# Altium PCB PWRMOD-001-RevA.PcbDoc
Units mm, origin at the board's own origin, x right, y up, seen from the top; angles counter-clockwise.
Board outline 50.8 x 47.24 mm, 4 copper layers (Top Layer, GND1, Layer 1, Bottom Layer), stack 1.716 mm thick; 46 components, 30 nets, 158 pads, 346 vias.
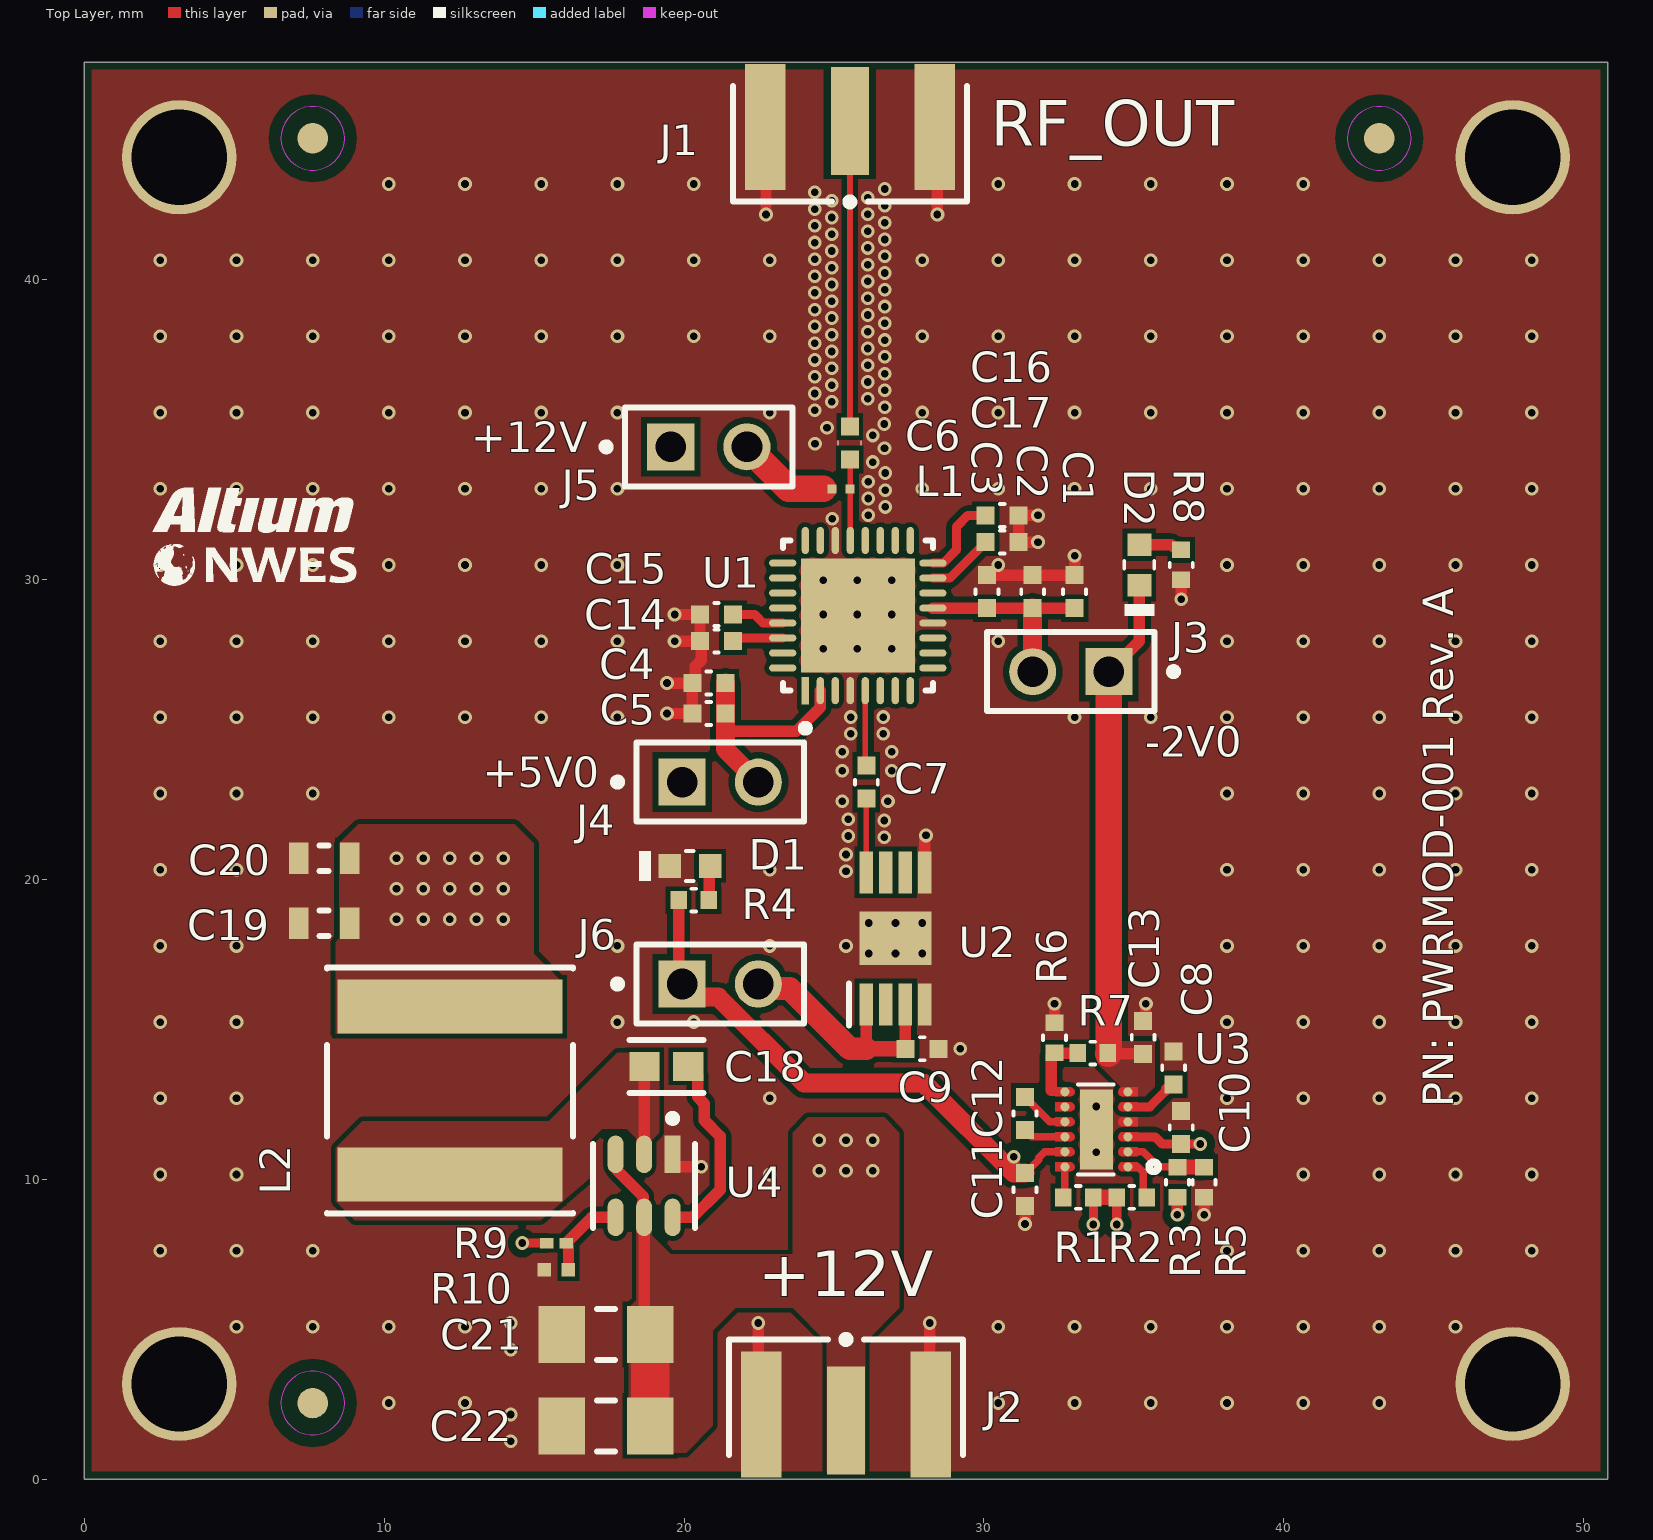
[diagram p0: Top Layer view]
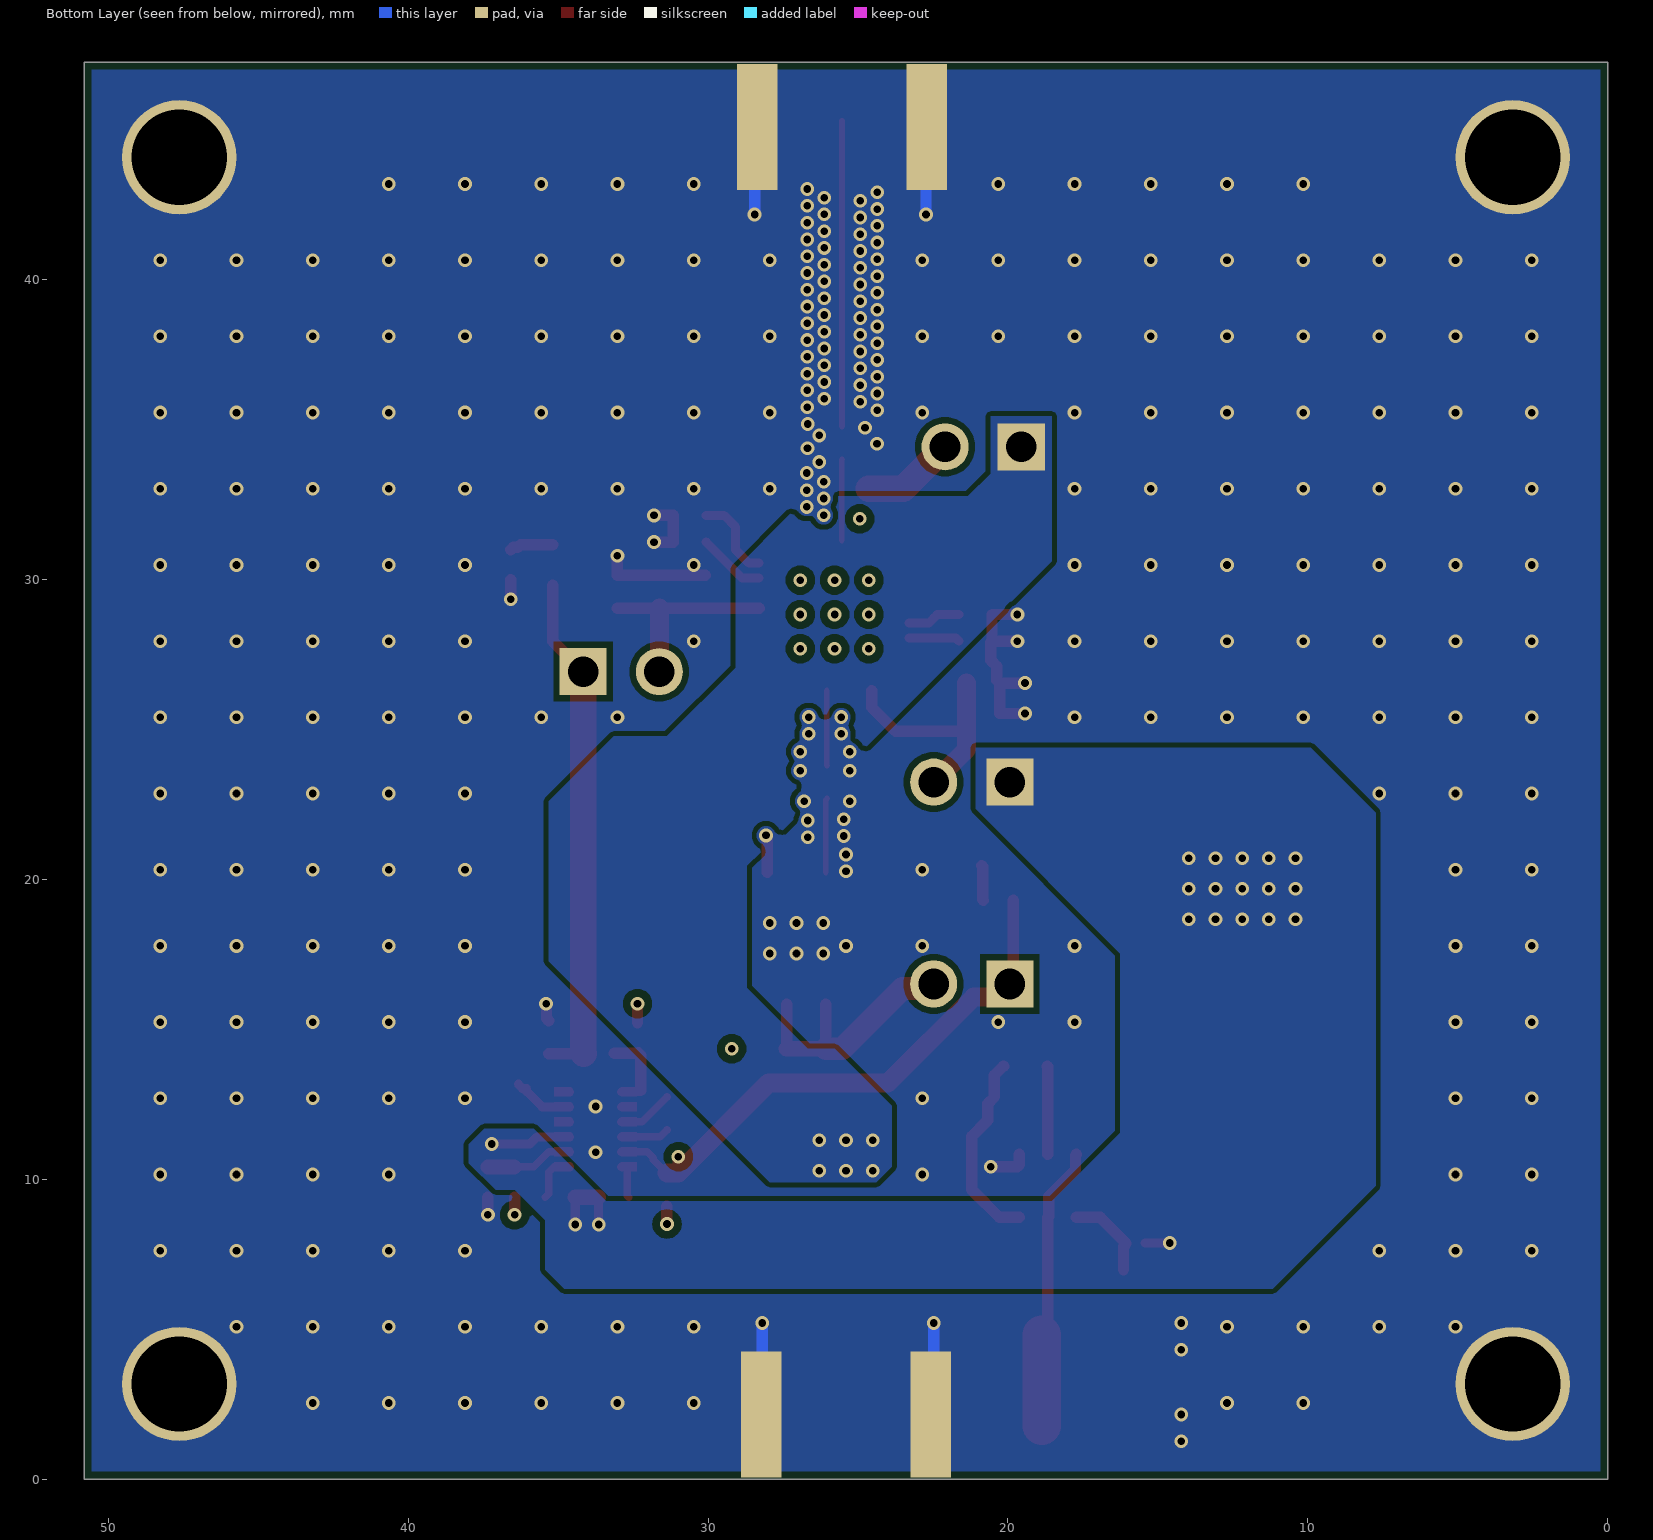
[diagram p1: Bottom Layer view, seen from below]
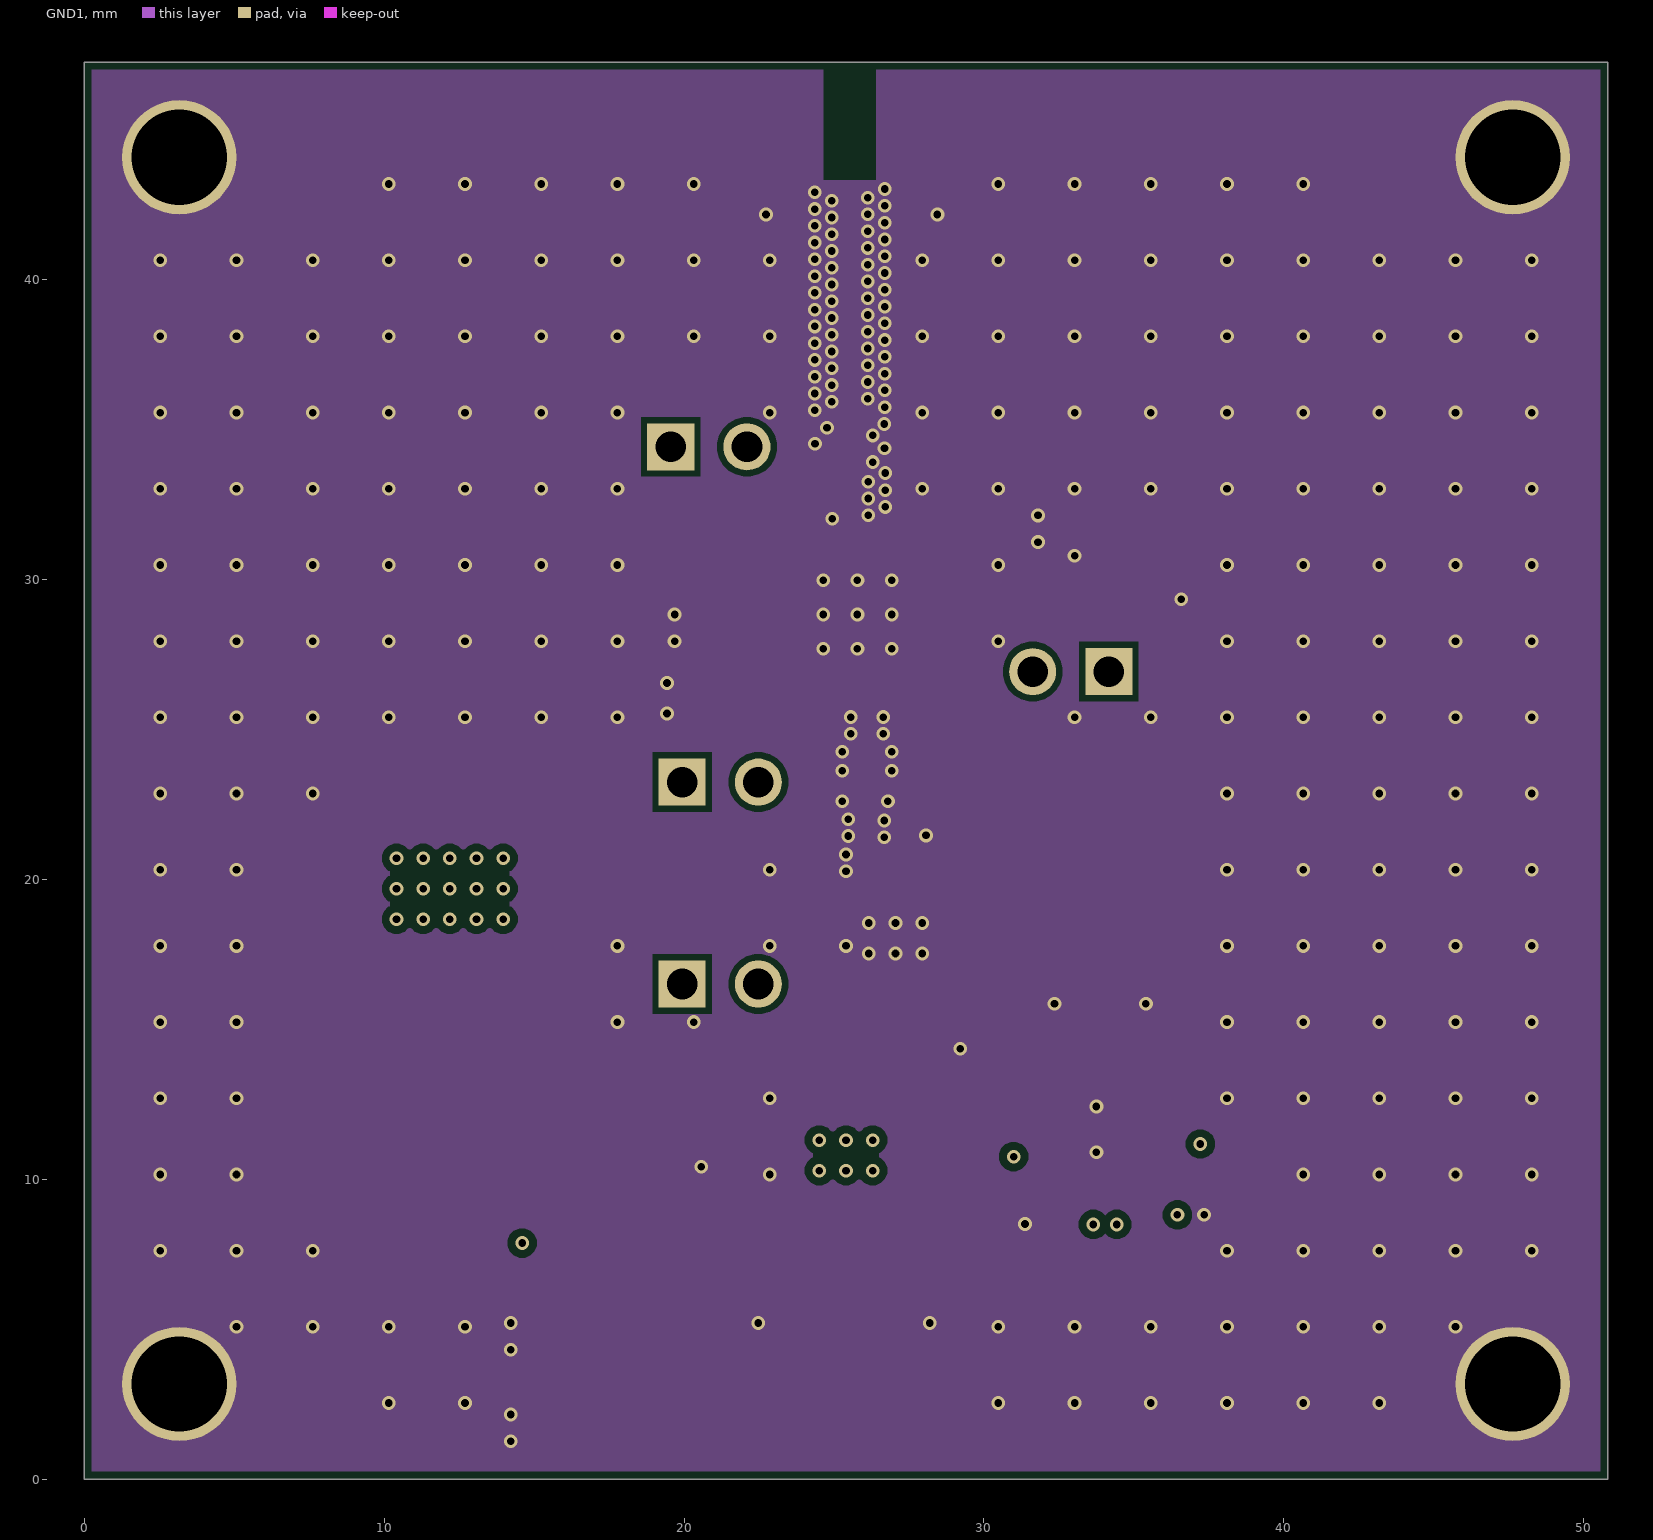
[diagram p2: GND1]
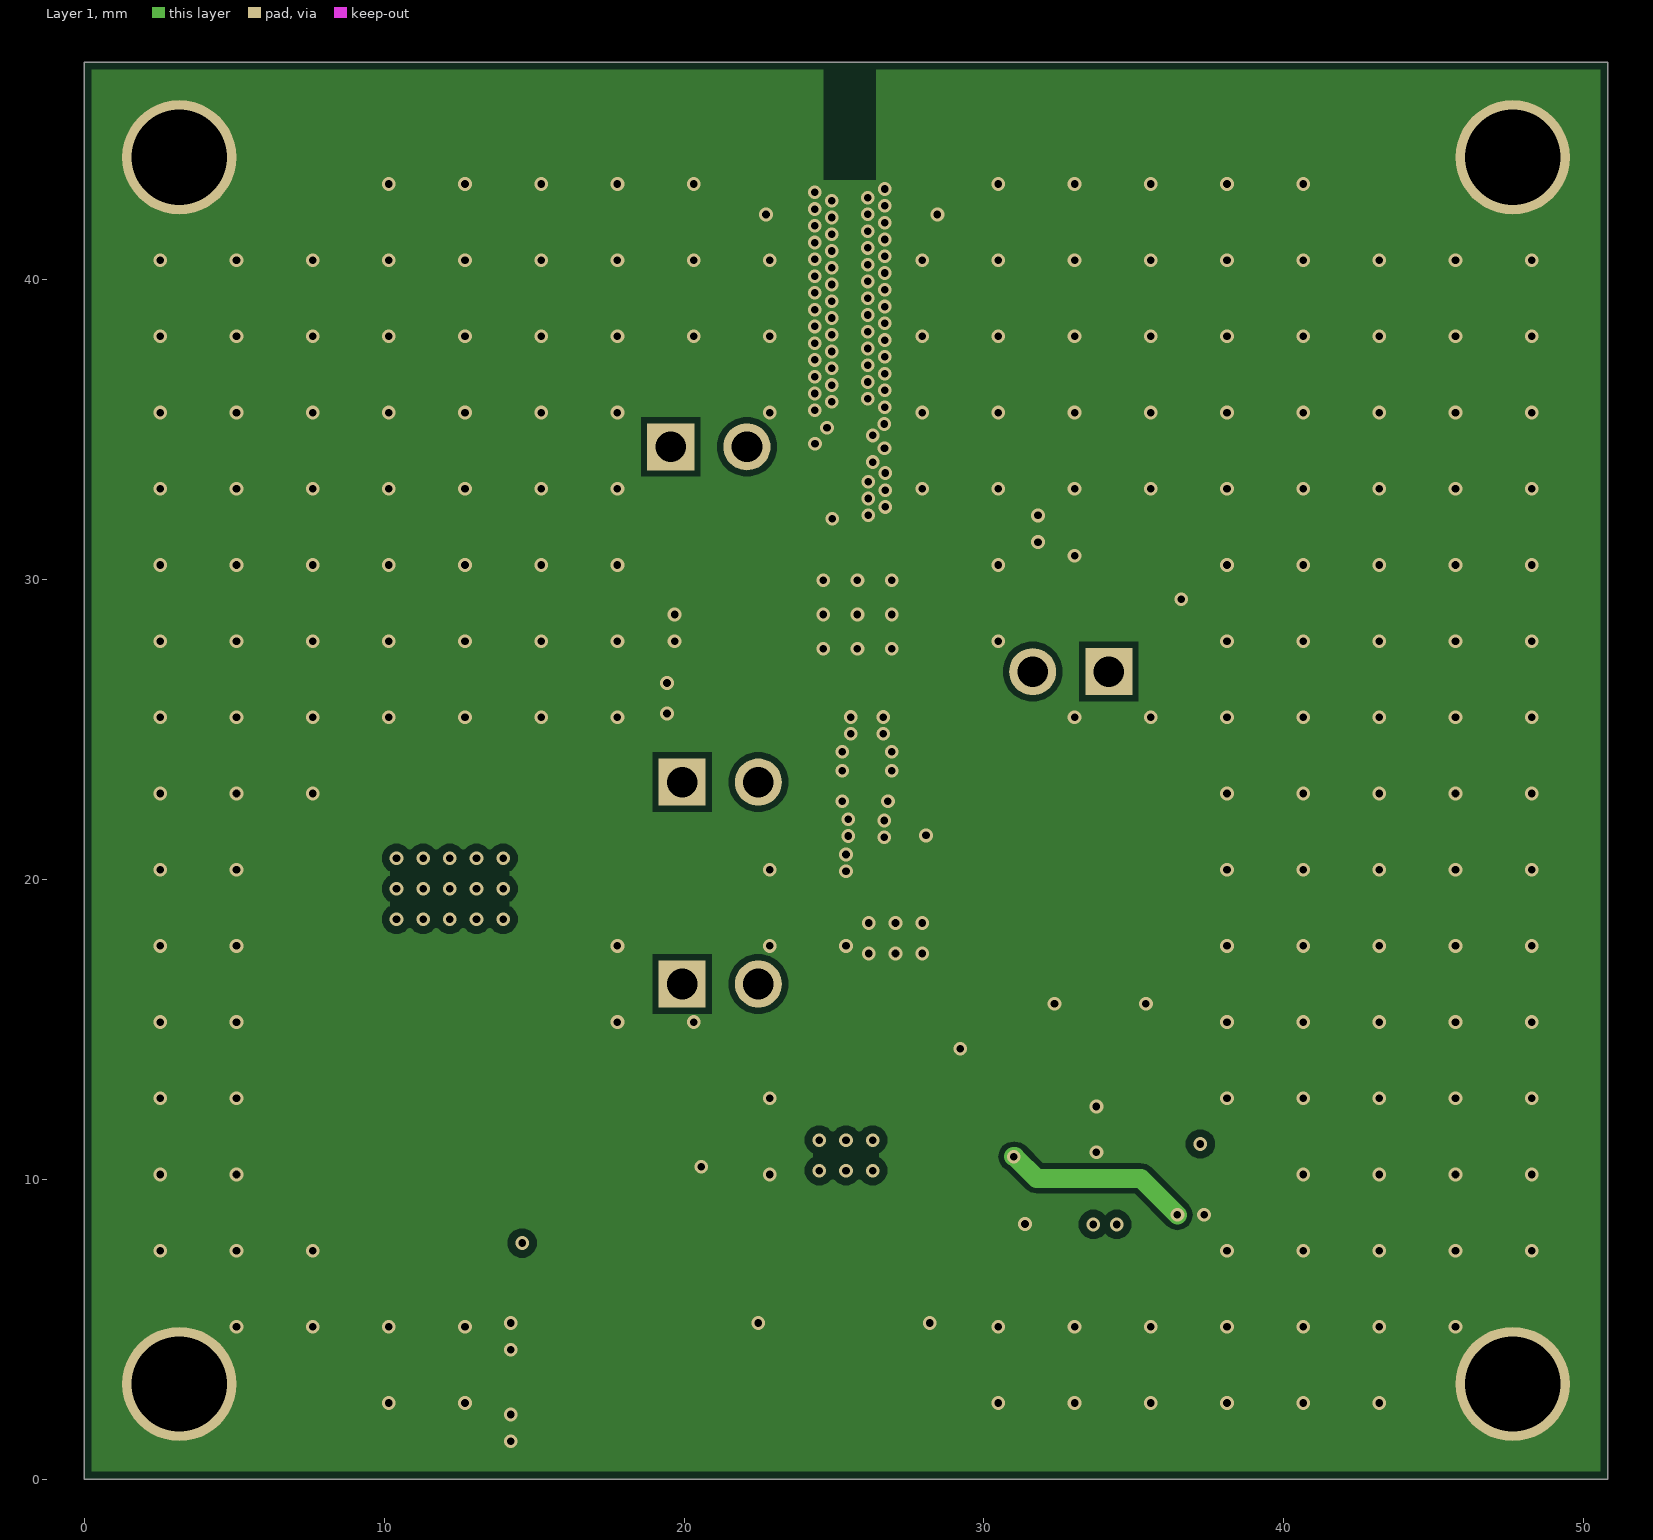
[diagram p3: Layer 1]
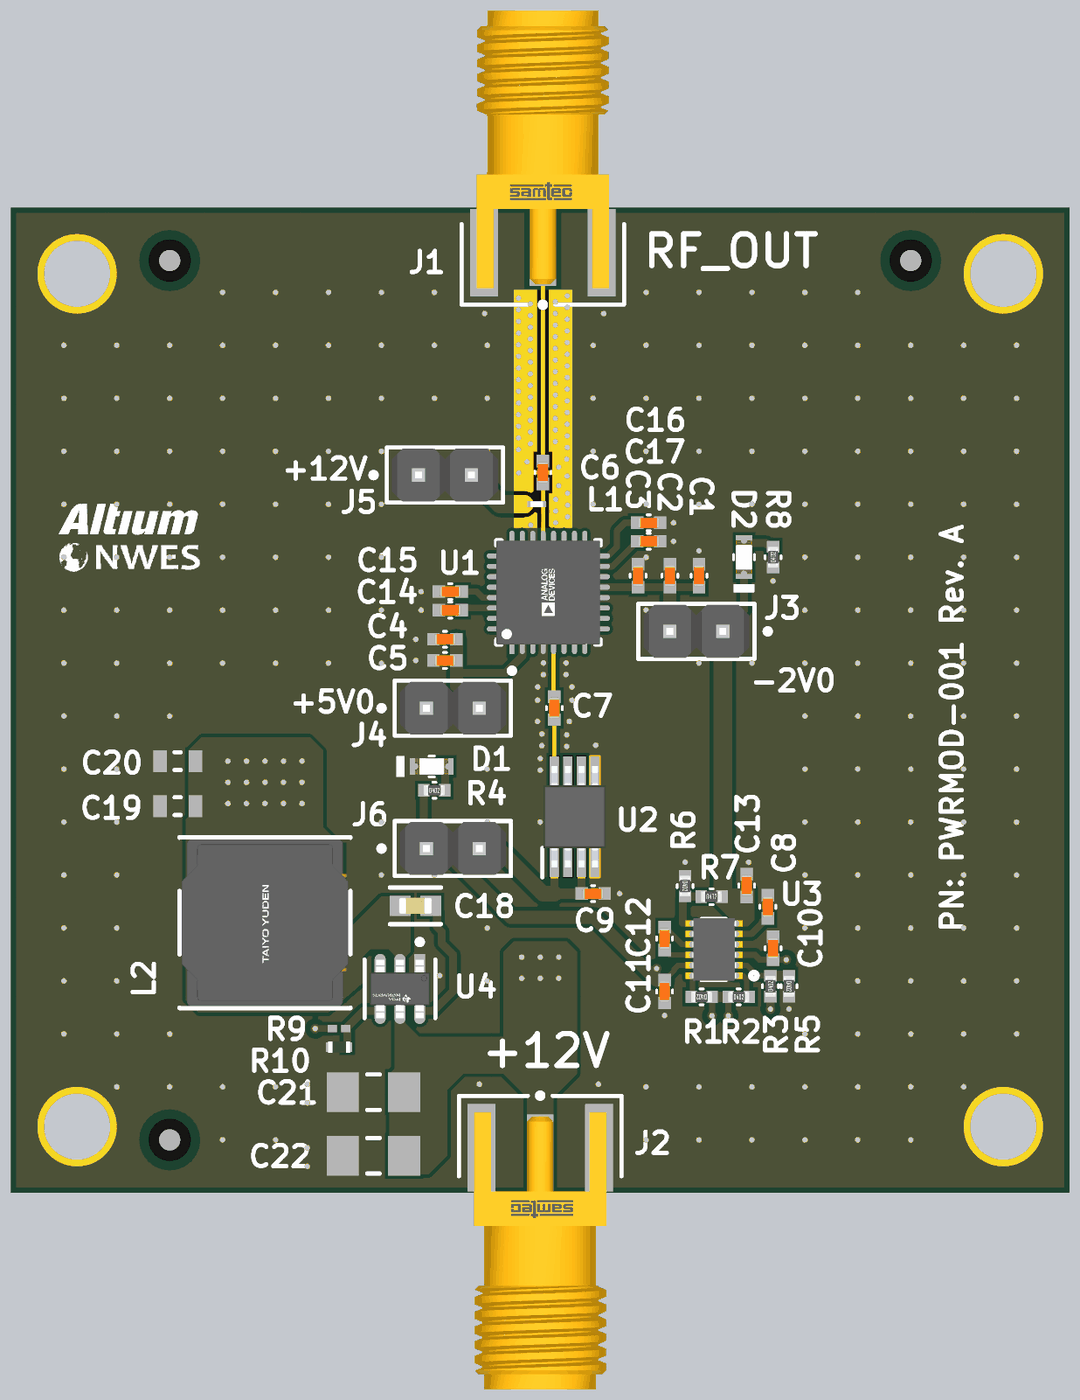
[diagram p4: 3D render of the assembled board from above, using the file's embedded part models]

## Layer stack, top to bottom
Top Solder: solder mask 0.0102, Solder Resist, Dk 3.5
Top Layer: signal copper 0.0356
Dielectric 2: prepreg 0.127, PP-006, Dk 4.1
GND1: signal copper 0.035
Dielectric 1: dielectric 1.3208, FR-4, Dk 4.8
Layer 1: signal copper 0.035
Dielectric 3: prepreg 0.127, PP-006, Dk 4.1
Bottom Layer: signal copper 0.0356
Board Layer Stack Bottom Solder: solder mask 0.0102, Solder Resist, Dk 3.5

## Board outline
0,0 0,47.244 50.8,47.244 50.8,0

## Design rules (kind name [scope] priority, off if disabled: settings)
BoardOutlineClearance BoardOutlineClearance_1 [(InComponent('J1') OR InComponent('J2'))] p1: gap=0 ignorepadtopadclearanceinfootprint=FALSE
BoardOutlineClearance [(InNet('GND') AND IsPolygon)] p2: gap=0.254 ignorepadtopadclearanceinfootprint=FALSE
Clearance Clearance_1 [All vs IsKeepOut] p1: gap=0.381 ignorepadtopadclearanceinfootprint=TRUE
Clearance Clearance_RF [InNetClass('RF') vs InNet('GND')] p2: gap=0.152 ignorepadtopadclearanceinfootprint=TRUE except(0: Arc-Hole Track-Hole SMDPad-Hole THPad-Hole Via-Hole Fill-Hole Poly-Hole Region-Hole Text-Hole)
Clearance [All] p3: gap=0.152 ignorepadtopadclearanceinfootprint=TRUE except(0: Arc-Hole Track-Hole SMDPad-Hole THPad-Hole Via-Hole Fill-Hole Poly-Hole Region-Hole Text-Hole; 0.178: Arc-Fill Arc-Poly Arc-Region Track-Fill Track-Poly Track-Region; 0.203: THPad-Fill THPad-Poly THPad-Region; 0.254: Via-Via Via-Fill Via-Poly Via-Region)
HoleSize [All] p1: absolutevalues=TRUE maxlimit=3.81 minlimit=0.025 maxpercent=80.000 minpercent=20.000
MinimumSolderMaskSliver [All] p1: minsoldermaskwidth=0.1
PolygonConnect [All] p1: connectstyle=Direct reliefconductorwidth=0.254 reliefentries=4 polygonreliefangle="90 Angle" airgapwidth=0.254
RoutingVias [All] p1: holewidth=0.305 width=0.508 viastyle="Through Hole" minholewidth=0.254 minwidth=0.457 maxholewidth=0.711 maxwidth=1.27
SilkToSilkClearance [All] p1: silktosilkclearance=0.127
SilkToSolderMaskClearance [IsPad] p1: minsilkscreentomaskgap=0.102 clearancetoexposedcopper=TRUE
SolderMaskExpansion [All] p1: expansion=0 istentingtop=TRUE
Width Width_RF [InNetClass('RF')] p1: maxlimit=0.753 minlimit=0.104 preferedwidth=0.753 toplayer_minwidth=0.197 toplayer_maxwidth=0.197 toplayer_prefwidth=0.197 midlayer1_maxwidth=0.104 midlayer1_prefwidth=0.104 midlayer2_maxwidth=0.104 midlayer2_prefwidth=0.104 bottomlayer_minwidth=0.753 impedanceprofiledriven=TRUE impedanceprofileid={C2D49C27-FCB0-4E96-A1DC-4C909A71807A} impedanceprofilevalue=50.000000 minimp=50.000000 maximp=50.000000 favimp=50.000000
Width [All] p2: maxlimit=1.27 minlimit=0.152 preferedwidth=0.254
26 further rules are at their usual default settings.

## Components (designator, comment, footprint, x,y, rotation, side; value= is the part's Value field where it differs from the comment)
C1 "4.7uF" 0402_CAP 33.02,29.591 r270 top
C2 "1000pF" 0402_CAP 31.623,29.591 r270 top
C3 "100pF" 0402_CAP 30.099,29.591 r270 top
C4 "1000pF" 0402_CAP 20.828,26.543 r0 top
C5 "1000pF" 0402_CAP 20.828,25.527 r0 top
C6 "1000pF" 0402_CAP 25.527,34.544 r270 top
C7 "1000pF" 0402_CAP 26.076,23.241 r90 top
C8 "4.7uF" 0402_CAP 36.322,13.716 r90 top
C9 "10uF" 0402_CAP 27.94,14.351 r180 top
C10 "2.2uF" 0402_CAP 36.576,11.726 r270 top
C11 "2.2uF" 0402_CAP 31.369,9.652 r90 top
C12 "4.7uF" 0402_CAP 31.369,12.192 r270 top
C13 "2.2uF" 0402_CAP 35.306,14.732 r90 top
C14 "1000pF" 0402_CAP 21.082,27.94 r0 top
C15 "4.7uF" 0402_CAP 21.082,28.829 r0 top
C16 "4.7uF" 0402_CAP 30.607,32.131 r180 top
C17 "1000pF" 0402_CAP 30.607,31.242 r180 top
C18 "C0603C104Z3VACTU" FP-C0603-CG-IPC_B 19.412,13.762 r0 top
C19 "C1608X5R1A226M080AC" CAPC1608X100X20ML10 8.001,18.542 r0 top
C20 "C1608X5R1A226M080AC" CAPC1608X100X20ML10 8.001,20.701 r0 top
C21 "GRM31CR61E106KA12L" CAPC3216X180X55ML20T25 17.399,1.778 r0 top
C22 "GRM31CR61E106KA12L" CAPC3216X180X55ML20T25 17.399,4.826 r0 top
D1 "GRN" LED_0603 20.193,20.447 r0 top
D2 "GRN" LED_0603 35.179,30.48 r90 top
J1 "SMA-J-P-H-ST-EM1" FP-SMA-J-P-H-ST-EM1-MFG 25.527,51.943 r180 top
J2 "SMA-J-P-H-ST-EM1" FP-SMA-J-P-H-ST-EM1-MFG 25.4,-4.699 r0 top
J3 "M20-9990246" FP-M20-9990246-MFG 32.893,26.924 r180 top
J4 "M20-9990246" FP-M20-9990246-MFG 21.209,23.241 r0 top
J5 "M20-9990246" FP-M20-9990246-MFG 20.828,34.417 r0 top
J6 "M20-9990246" FP-M20-9990246-MFG 21.209,16.51 r0 top
L1 "1.2nH" IND_0201 25.227,33.02 r0 top
L2 "NRS8030T3R3MJGJ" FP-NRS8030-MFG 12.192,12.954 r90 top
R1 "10K" 0402_RES 33.147,9.398 r180 top
R2 "10K" 0402_RES 34.925,9.398 r0 top
R3 "15K" 0402_RES 36.449,9.906 r90 top
R4 "120" 0402_RES 20.32,19.304 r0 top
R5 "10K" 0402_RES 37.338,9.906 r270 top
R6 "10K" 0402_RES 32.351,14.712 r270 top
R7 "6.34K" 0402_RES 33.621,14.204 r0 top
R8 "120" 0402_RES 36.576,30.48 r90 top
R9 "CRCW020156K2FNED" RESC0603X28X15NL05T05 15.748,7.874 r180 top
R10 "ERJ2RKF1002X" RESC1005X40X25LL05T05 15.748,6.985 r0 top
U1 "HMC637ALP5E" FP-HCP-32-1-IPC_A 25.793,28.792 r90 top
U2 "HMC358MS8GE" SOP65P488X110-9N 27.051,18.034 r90 top
U3 "LM27762DSSR" SON50P200X300X80-13N-D 33.748,11.664 r180 top
U4 "TPS562201DDCR" FP-DDC0006A-IPC_C 18.669,9.779 r270 top

## Footprints (in the part's own frame and the unit in brackets; to place one, negate y for a bottom-side part, rotate by r counter-clockwise, add the part's x,y. Pads: shape width x height; smd on the part's side, far side on the other; paste and mask are expansions set on the pad)
0402_CAP [mm] "0402 (1005) SMD Capacitor"
  rect 0.6x0.6 smd mask+0: 1(-0.55,0) 2(0.55,0)
  silkscreen extent -0.08,-0.38 0.08,0.38, body extent -0.51,-0.25 0.51,0.25, height 0.5
0402_RES [mm] "0402 (1005) SMD Resistor"
  rect 0.55x0.6 smd mask+0: 1(-0.5,0) 2(0.5,0)
  silkscreen extent -0.08,-0.38 0.08,0.38, body extent -0.5,-0.25 0.5,0.25, height 0.35
CAPC1608X100X20ML10 [mm] "Chip Capacitor, 2-Leads, Body 1.70x0.90mm, IPC Low Density"
  rect 0.65x1.05 smd mask+0: 1(-0.85,0) 2(0.85,0)
  silkscreen extent -0.15,-0.43 0.15,0.43, body extent -0.85,-0.45 0.85,0.45, height 1
CAPC3216X180X55ML20T25 [mm] "Chip Capacitor, 2-Leads, Body 3.4x1.8mm, IPC Low Density"
  rect 1.55x1.9 smd mask+0: 1(-1.475,0) 2(1.475,0)
  silkscreen extent -0.3,-0.85 0.3,0.85, body extent -1.7,-0.9 1.7,0.9, height 1.8
FP-C0603-CG-IPC_B [mm]
  rect 1.007x0.958 smd paste+0 mask+0: 1(-0.726,0) 2(0.726,0)
  silkscreen extent -1.23,-0.88 1.23,0.88, body extent -1.48,-0.73 1.48,0.73, height 0.25
FP-DDC0006A-IPC_C [mm]
  rect 1.254x0.532 smd paste+0 mask+0: 1(-1.05,0.95)
  rrect100% 1.254x0.532 smd paste+0 mask+0: 2(-1.05,0) 3(-1.05,-0.95) 4(1.05,-0.95) 5(1.05,0) 6(1.05,0.95)
  silkscreen extent -2.37,-1.7 1.4,1.7, body extent -1.78,-1.55 1.78,1.55, height 0.25
FP-HCP-32-1-IPC_A [mm]
  rect 0.906x0.239 smd paste+0 mask+0: 1(-2.503,1.75)
  rrect100% 0.906x0.239 smd paste+0 mask+0: 2(-2.503,1.25) 3(-2.503,0.75) 4(-2.503,0.25) 5(-2.503,-0.25) 6(-2.503,-0.75) 7(-2.503,-1.25) 8(-2.503,-1.75) 17(2.503,-1.75) 18(2.503,-1.25) 19(2.503,-0.75) 20(2.503,-0.25) 21(2.503,0.25) 22(2.503,0.75) 23(2.503,1.25) 24(2.503,1.75)
  rrect100% 0.239x0.906 smd paste+0 mask+0: 9(-1.75,-2.503) 10(-1.25,-2.503) 11(-0.75,-2.503) 12(-0.25,-2.503) 13(0.25,-2.503) 14(0.75,-2.503) 15(1.25,-2.503) 16(1.75,-2.503) 25(1.75,2.503) 26(1.25,2.503) 27(0.75,2.503) 28(0.25,2.503) 29(-0.25,2.503) 30(-0.75,2.503) 31(-1.25,2.503) 32(-1.75,2.503)
  rect 3.8x3.8 smd paste-1000 mask+0: 33(0,0)
  silkscreen extent -3.88,-2.5 2.5,2.5, body extent -3.46,-3.46 3.46,3.46, height 0.25
FP-M20-9990246-MFG [mm]
  rect 1.57x1.57 hole 1.02 paste-1000 mask+0: 1(-1.27,0)
  round 1.57 hole 1.02 paste-1000 mask+0: 2(1.27,0)
  silkscreen extent -3.55,-1.32 2.79,1.32, body extent -2.89,-1.42 2.89,1.42, height 0.25
FP-NRS8030-MFG [mm]
  rect 1.8x7.5 smd paste+0 mask+0: 1(-2.8,0) 2(2.8,0)
  silkscreen extent -4.1,-4.1 4.1,4.1, body extent -4.2,-4.2 4.2,4.2, height 0.25
FP-SMA-J-P-H-ST-EM1-MFG [mm]
  rect 1.27x3.6 smd paste+0 mask+0: 1(0,6.66)
  rect 1.35x4.2 smd paste+0 mask+0: 2(-2.825,6.86) 3(2.825,6.86)
  rect 1.35x4.2 smd far side paste+0 mask+0: 4(-2.825,6.86) 5(2.825,6.86)
  silkscreen extent -3.9,5.5 3.9,9.48, body extent -3.6,-4.92 3.6,9.06, height 0.25
IND_0201 [mm]
  rect 0.3x0.3 smd mask+0: 1(-0.3,0) 2(0.3,0)
  body extent -0.3,-0.15 0.3,0.15, height 0.42
LED_0603 [mm]
  rect 0.75x0.8 smd mask+0: 1(0.675,0) 2(-0.675,0)
  silkscreen extent -1.7,-0.5 0.13,0.5, body extent -0.8,-0.4 0.8,0.4, height 0.6
RESC0603X28X15NL05T05 [mm] "Chip Resistor, 2-Leads, Body 0.60x0.30mm, IPC Medium Density"
  rect 0.45x0.35 smd mask+0: 1(-0.325,0) 2(0.325,0)
  body extent -0.33,-0.17 0.33,0.18, height 0.28
RESC1005X40X25LL05T05 [mm] "Chip Resistor, 2-Leads, Body 1.05x0.55mm, IPC High Density"
  rect 0.45x0.45 smd mask+0: 1(-0.4,0) 2(0.4,0)
  body extent -0.53,-0.28 0.53,0.28, height 0.4
SON50P200X300X80-13N-D [mm]
  round 0.3 smd mask+0: 1(-1.05,1.25) 2(-1.05,0.75) 3(-1.05,0.25) 4(-1.05,-0.25) 5(-1.05,-0.75) 6(-1.05,-1.25) 7(1.05,-1.25) 8(1.05,-0.75) 9(1.05,-0.25) 10(1.05,0.25) 11(1.05,0.75) 12(1.05,1.25)
  rect 1.1x2.66 smd mask+0: 13(0,0)
  Top Layer region: 1.375,1.1 0.875,1.099 0.836,1.104 0.799,1.119 0.768,1.143 0.744,1.174 0.729,1.211 0.724,1.25 0.729,1.289 0.744,1.326 0.768,1.357 0.799,1.381 0.836,1.396 0.875,1.401 0.875,1.4 1.375,1.4 1.375,1.1
  Top Layer region: 1.375,0.6 0.875,0.599 0.836,0.604 0.799,0.619 0.768,0.643 0.744,0.674 0.729,0.711 0.724,0.75 0.729,0.789 0.744,0.826 0.768,0.857 0.799,0.881 0.836,0.896 0.875,0.901 0.875,0.9 1.375,0.9 1.375,0.6
  Top Layer region: 1.375,0.1 0.875,0.099 0.836,0.104 0.799,0.119 0.768,0.143 0.744,0.174 0.729,0.211 0.724,0.25 0.729,0.289 0.744,0.326 0.768,0.357 0.799,0.381 0.836,0.396 0.875,0.401 0.875,0.4 1.375,0.4 1.375,0.1
  Top Layer region: 1.375,-0.4 0.875,-0.401 0.836,-0.396 0.799,-0.381 0.768,-0.357 0.744,-0.326 0.729,-0.289 0.724,-0.25 0.729,-0.211 0.744,-0.174 0.768,-0.143 0.799,-0.119 0.836,-0.104 0.875,-0.099 0.875,-0.1 1.375,-0.1 1.375,-0.4
  Top Layer region: 1.375,-0.9 0.875,-0.901 0.836,-0.896 0.799,-0.881 0.768,-0.857 0.744,-0.826 0.729,-0.789 0.724,-0.75 0.729,-0.711 0.744,-0.674 0.768,-0.643 0.799,-0.619 0.836,-0.604 0.875,-0.599 0.875,-0.6 1.375,-0.6 1.375,-0.9
  Top Layer region: 1.375,-1.4 0.875,-1.401 0.836,-1.396 0.799,-1.381 0.768,-1.357 0.744,-1.326 0.729,-1.289 0.724,-1.25 0.729,-1.211 0.744,-1.174 0.768,-1.143 0.799,-1.119 0.836,-1.104 0.875,-1.099 0.875,-1.1 1.375,-1.1 1.375,-1.4
  Top Layer region: -1.375,-1.1 -0.875,-1.099 -0.836,-1.104 -0.799,-1.119 -0.768,-1.143 -0.744,-1.174 -0.729,-1.211 -0.724,-1.25 -0.729,-1.289 -0.744,-1.326 -0.768,-1.357 -0.799,-1.381 -0.836,-1.396 -0.875,-1.401 -0.875,-1.4 -1.375,-1.4 -1.375,-1.1
  Top Layer region: -1.375,-0.6 -0.875,-0.599 -0.836,-0.604 -0.799,-0.619 -0.768,-0.643 -0.744,-0.674 -0.729,-0.711 -0.724,-0.75 -0.729,-0.789 -0.744,-0.826 -0.768,-0.857 -0.799,-0.881 -0.836,-0.896 -0.875,-0.901 -0.875,-0.9 -1.375,-0.9 -1.375,-0.6
  Top Layer region: -1.375,-0.1 -0.875,-0.099 -0.836,-0.104 -0.799,-0.119 -0.768,-0.143 -0.744,-0.174 -0.729,-0.211 -0.724,-0.25 -0.729,-0.289 -0.744,-0.326 -0.768,-0.357 -0.799,-0.381 -0.836,-0.396 -0.875,-0.401 -0.875,-0.4 -1.375,-0.4 -1.375,-0.1
  Top Layer region: -1.375,0.4 -0.875,0.401 -0.836,0.396 -0.799,0.381 -0.768,0.357 -0.744,0.326 -0.729,0.289 -0.724,0.25 -0.729,0.211 -0.744,0.174 -0.768,0.143 -0.799,0.119 -0.836,0.104 -0.875,0.099 -0.875,0.1 -1.375,0.1 -1.375,0.4
  Top Layer region: -1.375,0.9 -0.875,0.901 -0.836,0.896 -0.799,0.881 -0.768,0.857 -0.744,0.826 -0.729,0.789 -0.724,0.75 -0.729,0.711 -0.744,0.674 -0.768,0.643 -0.799,0.619 -0.836,0.604 -0.875,0.599 -0.875,0.6 -1.375,0.6 -1.375,0.9
  Top Layer region: -1.375,1.4 -0.875,1.401 -0.836,1.396 -0.799,1.381 -0.768,1.357 -0.744,1.326 -0.729,1.289 -0.724,1.25 -0.729,1.211 -0.744,1.174 -0.768,1.143 -0.799,1.119 -0.836,1.104 -0.875,1.099 -0.875,1.1 -1.375,1.1 -1.375,1.4
  silkscreen extent -2.06,-1.5 0.62,1.5, body extent -1.05,-1.5 1.05,1.5, height 0.8
SOP65P488X110-9N [mm]
  rect 1.4x0.45 smd mask+0.05: 1(-2.2,0.975) 2(-2.2,0.325) 3(-2.2,-0.325) 4(-2.2,-0.975) 5(2.2,-0.975) 6(2.2,-0.325) 7(2.2,0.325) 8(2.2,0.975)
  rect 1.78x2.41 smd mask+0: 9(0,0)
  silkscreen extent -2.9,1.55 -1.5,1.55, body extent -2.44,-1.5 2.44,1.5, height 1.1

## Part data
C1 C8 C12 C15 C16: library part "CAP CER 4.7UF 10V X5R 0402", "CAP CER 4.7UF 10V X5R 0402", Manufacturer="Samsung Electro-Mechanics", PartNumber=CL05A475MP5NRNC, Supplier Part Number 1=1276-1482-1-ND, ComponentLink1Description="Datasheet link", ComponentLink1URL=http://ds.yuden.co.jp/TYCOMPAS/ut/detail.do?productNo=LMK105BJ104KV-F&fileName=LMK105BJ104KV-F_SS&mode=specSheetDownload, PackageReference=0402, Supplier 1=Digi-Key, Technology=Ceramic
C2 C4 C5 C6 C14 C17: library part Capacitor, "CAP CER 1000PF 25V X7R 0402", Manufacturer=KEMET, Manufacturer Part Number=C0402C102J3RECAUTO, ComponentLink1Description="Datasheet link", ComponentLink1URL=http://ds.yuden.co.jp/TYCOMPAS/ut/detail.do?productNo=LMK105BJ104KV-F&fileName=LMK105BJ104KV-F_SS&mode=specSheetDownload, CompType=Capacitor, PackageReference=0402, Supplier 1=Digi-Key, TaMax_C=85°C, TaMin_C=-55°C, Technology=Ceramic
C3: library part Capacitor, "CAP CER 100PF 25V X7R 0402", Manufacturer="AVX Corporation", PartNumber=04023C101KAT2A, Supplier Part Number 1=478-10080-2-ND, ComponentLink1Description="Datasheet link", ComponentLink1URL=http://ds.yuden.co.jp/TYCOMPAS/ut/detail.do?productNo=LMK105BJ104KV-F&fileName=LMK105BJ104KV-F_SS&mode=specSheetDownload, CompType=Capacitor, PackageReference=0402, Supplier 1=Digi-Key, TaMax_C=85°C, TaMin_C=-55°C, Technology=Ceramic
C7: library part Capacitor, "CAP CER 1000PF 50V C0G/NP0 0402", Manufacturer="Murata Electronics", PartNumber=GCM1555C1H102FA16D, Supplier Part Number 1=490-16461-2-ND, ComponentLink1Description="Datasheet link", ComponentLink1URL=http://ds.yuden.co.jp/TYCOMPAS/ut/detail.do?productNo=LMK105BJ104KV-F&fileName=LMK105BJ104KV-F_SS&mode=specSheetDownload, CompType=Capacitor, PackageReference=0402, Supplier 1=Digi-Key, TaMax_C=85°C, TaMin_C=-55°C, Technology=Ceramic
C9: library part Cap, "CAP CER 10UF 6.3V X5R 0402", Manufacturer="Murata Electronics", Package=0402, PartNumber=GRJ155R60J106ME11D, Supplier Part Number 1=490-13211-1-ND, Supplier 1=Digikey
C10 C11 C13: library part Cap, "CAP CER 2.2UF 16V X6S 0402", Manufacturer="TDK Corporation", Package=0402, PartNumber=C1005X6S1C225M050BC, Supplier Part Number 1=445-9101-2-ND, Supplier 1=Digikey
C18: library part CMP-2006-03069-2, "CAP CER 0.1UF 25V Y5V 0603", Capacitance=100nF, Case Code (Imperial)=0603, Case Code (Metric)=1608, Dielectric=Y5V, Dielectric Material=Ceramic, Max Operating Temperature=85°C, Min Operating Temperature=-30°C, Package Quantity=1, Tolerance=80%, Voltage=25V, Case/Package=0603, Construction=Flat, Depth=0.8mm, Dissipation Factor=7%, Height=0.8mm, Lead Free="Lead Free", Lead Pitch=0.7mm, Length=1.6mm, Mount="Surface Mount", Number of Pins=2, Packaging="Tape and Reel", Radiation Hardening=No, REACH SVHC="No SVHC", RoHS Compliant=Yes, Series=C, Termination=SMD/SMT, Thickness=0.034inch, Voltage Rating=25V, Voltage Rating (DC)=25V, Width=0.031inch
C19 C20: library part CMP-2000-05441-1, "Chip Capacitor, 22 uF, +/- 20%, 10 V, -55 to 85 degC, 0603 (1608 Metric), RoHS, Tape and Reel", Capacitance=22µF, Manufacturer=TDK, Operating Temperature=-55degC~85degC, Package / Case=0603(1608Metric), Package Description="2-Pin Surface Mount Device, Body 1.6 x 0.8 mm", Package Reference=603, PCN Part Number=MLCCPartNumberChange30/Nov/2012, Ratings=-, Standard Package=1, Temperature Coefficient=X5R, Tolerance=±20%, Voltage - Rated=10V, Applications=GeneralPurpose, Category=Capacitors, Datasheet URL=http://download.siliconexpert.com/pdfs/2015/4/21/15/54/45/779/tdk_/manual/37024850441143360mlcc_commercial_general_en.pdf, Datasheet Version=Mar-15, Design Resources=20WNon-IsolatedBuckLEDDriverUsingPLLNK460KG, Family=CeramicCapacitors, Features=-, Height - Seated (Max)=-, Kits=445-9014-KIT-ND-KITMLCC100PF-22UF060310-50V, Lead Spacing=-, Lead Style=-, Manufacturer URL=http://www.tdk.com/, Mounting Type=SurfaceMount,MLCC, Online Catalog=CSeries,GeneralPurpose, Other Names=445-9077-1, Packaging=CutTape(CT), Product Training Modules=CSeriesGeneralApplicationsSEAT,CCV,andTVCLDesignToolsGuidetoReplacinganElectrolyticCapacitorwithanMLCC, RoHS Information=RoHSCertificate-MLCC, Series=C, Size / Dimension="0.063\"Lx0.031\"W(1.60mmx0.80mm)", Thickness (Max)="0.035\"(0.90mm)"
C21 C22: library part CMP-2000-04947-1, "Chip Capacitor, 10 uF, +/- 10%, 25 V, -55 to 85 degC, 1206 (3216 Metric), RoHS, Tape and Reel", Capacitance=10uF, Case Code - in=1206, Case Code - mm=3216, Case Height=1.6mm, Case Length=3.2mm, Dielectric=X5R, Manufacturer=Murata, Maximum Operating Temperature=+85C, Minimum Operating Temperature=-55C, Package / Case=1206(3216metric), Package Description="2-Pin Surface Mount Device, Body 3.2 x 1.6 mm", Tolerance=10%, Voltage Rating DC=25V, Brand=MurataElectronics, Case Width=1.6mm, Datasheet URL=https://datasheet.ciiva.com/11786/0900766b80ef921d-11786983.pdf, Datasheet Version=Sep-13, Factory Pack Quantity=2000, Manufacturer URL=http://www.murata.com/, Package Reference=1206, Packaging=Reel, Product=GeneralTypeMLCCs, Product Category=MultilayerCeramicCapacitorsMLCC-SMD/SMT, RoHS=Details, Series=GRM, Termination Style=SMD/SMT, Type=GeneralPurposeMLCC
D1 D2: library part 0603LED_GRN, "LED GREEN CLEAR CHIP 0603 SMD", Manufacturer=Kingbright, PartNumber=APTD1608CGCK, Supplier Part Number 1=754-1545-2-ND, Supplier 1=Digi-Key, Unit Cost, Qty 1=$0.68, Unit Cost, Qty 500=$0.293
J1 J2: library part CMP-02754-000006-1, "CONN SMA JACK STR 50OHM EDGE MNT", Case/Package=SMA, Dielectric Material=PTFE, Housing Color=Gold, Max Frequency=6GHz, Max Operating Temperature=125°C, Min Operating Temperature=-65°C, Package Quantity=1, Voltage Rating=335V, Body Material=Brass, Body Plating=Gold, Center Contact Plating=Gold, Connector Type=SMA, Contact Material=Copper, Contact Plating=Gold, Depth=13.33mm, Fastening Type=Threaded, Impedance=50R, Insulation Material=Polytetrafluoroethylene, Length=6.35mm, Manufacturer Part Number=SMA-J-P-H-ST-EM1, Mount=Edge, Orientation=Straight, Packaging=Tray, Radiation Hardening=No, RoHS Compliant=Yes, Series=SMA, Termination=Solder
J3 J4 J5 J6: library part CMP-15831-000009-1, "CONN HEADER VERT 2POS 2.54MM", Current Rating=3A, Manufacturer=Harwin, Temperature="-40°C to +105°C", Temperature Range High=+105°C, Temperature Range Low=-40°C, Automotive=No, Category=Conn, ComponentLink2Description=Datasheet, ComponentLink2URL=https://cdn.harwin.com/pdfs/M20-999.pdf, Conn Gender=Male, Conn Orientation=Vertical, Contact Material=Tin,Nickel, Device Class L1=Connectors, Device Class L2="Headers and Wire Housings", Device Class L3=unset, Digikey Description="CONN HEADER VERT 2POS 2.54MM", Height=8.99mm, Lead Free=Yes, Manufacturer Part Number=M20-9990246, Mouser Description="2.54mm (0.1\") Pitch SIL Vertical PC Tail Pin Header, 6.1mm mating pin height, tin, 2 contacts", Number of Contacts=2, Number of Rows=1, Octopart=https://octopart.com/m20-9990246-harwin-2590635, Package=M20-9990246, Pitch=2.54mm, RoHS=TRUE
L1: library part INDUCTOR, "FIXED IND 1.2NH 1.1A 40MOHM SMD", Manufacturer="Murata Electronics", PartNumber=LQP03HQ1N2B02D, Supplier Part Number 1=490-13874-1-ND, ComponentLink1Description="Datasheet link", ComponentLink1URL=http://www.yuden.co.jp/ut/product/category/inductor/BRC2012T2R2MD.pdf, CompType=Inductor, Supplier 1=Digi-Key
L2: library part CMP-14484-000405-1, "Inductor Power Shielded Wirewound 3.3uH 20% 100KHz Ferrite 4.2A 24.7mΩ DCR T/R", Case/Package=Nonstandard, Current Rating=4.3A, DC Resistance (DCR)=19mR, Inductance=3.3uH, Inductance Tolerance=20%, Max DC Current=4.2A, Max Operating Temperature=125°C, Min Operating Temperature=-25°C, Package Quantity=1000, Resistor Type=Wirewound, Self Resonant Frequency=50MHz, Test Frequency=100kHz, Core Material=Ferrite, Depth=8.2mm, Halogen Free="Halogen Free", Height=3mm, Height - Seated (Max)=0.118inch, Lead Free="Lead Free", Lead Pitch=5.6mm, Length=8mm, Mount="Surface Mount", Number of Pins=2, Packaging="Tape and Reel", Radiation Hardening=No, REACH SVHC="No SVHC", RMS Current (Irms)=4.3A, RoHS Compliant=Yes, Saturation Current=4.2A, Series=NRS, Shielding=Shielded, Termination=SMD/SMT, Tolerance=20%, Width=0.315inch
R1 R2 R5 R6: library part CMP-0026823-3, "RES 10K OHM 1% 1/16W 0402", Manufacturer="Stackpole Electronics Inc", PartNumber=RMCF0402FT10K0, Supplier Part Number 1=RMCF0402FT10K0TR-ND, ComponentLink1Description="Datasheet link", ComponentLink1URL=http://www.vishay.com/docs/20035/dcrcwe3.pdf, CompType=Resistor, MountType=SMT, PackageReference=0402, Supplier 1=Digi-Key, Technology="Thick Film", ValueDisplayed=10K
R3: library part CMP-0026823-3, "RES SMD 15K OHM 1% 1/16W 0402", Manufacturer=Yageo, PartNumber=RC0402FR-0715KL, Supplier Part Number 1=311-15.0KLRTR-ND, ComponentLink1Description="Datasheet link", ComponentLink1URL=http://www.vishay.com/docs/20035/dcrcwe3.pdf, CompType=Resistor, MountType=SMT, PackageReference=0402, Supplier 1=Digi-Key, Technology="Thick Film", ValueDisplayed=15K
R4 R8: library part "RES 120 OHM 1% 1/16W 0402", "RES 120 OHM 1% 1/16W 0402", Manufacturer=Yageo, PartNumber=RC0402FR-07120RL, Supplier Part Number 1=311-120LRCT-ND, Tolerance_%=1%, ComponentLink1Description="Datasheet link", ComponentLink1URL=http://www.vishay.com/docs/20035/dcrcwe3.pdf, CompType=Resistor, MountType=SMT, PackageReference=0402, Supplier 1=Digi-Key, Technology="Thick Film"
R7: library part "RES 6.34K OHM 1% 1/16W 0402", "RES 6.34K OHM 1% 1/16W 0402", Manufacturer=Yageo, PartNumber=RC0402FR-076K34L, Supplier Part Number 1=YAG3218CT-ND, Tolerance_%=1%, ComponentLink1Description="Datasheet link", ComponentLink1URL=http://www.vishay.com/docs/20035/dcrcwe3.pdf, CompType=Resistor, MountType=SMT, PackageReference=0402, Supplier 1=Digi-Key, Technology="Thick Film"
R9: library part CMP-2004-00723-1, Manufacturer="Vishay Dale", Part Number=CRCW020156K2FNED
R10: library part CMP-2000-07588-1, "Chip Resistor, 10 KOhm, +/- 1%, 0.1 W, -55 to 155 degC, 0402 (1005 Metric), RoHS, Tape and Reel", Case Code (Imperial)=0402, Case Code (Metric)=1005, Manufacturer=Panasonic, Max Operating Temperature=155degC, Max Power Dissipation=100mW, Min Operating Temperature=-55degC, Package Description="2-Pin Surface Mount Device, Body 1 x 0.5 mm", Package Quantity=1, Package Reference=402, Resistance=10KOhm, Temperature Coefficient=100ppm\/degreesC, Tolerance=1%, Voltage Rating=50V, Case\/Package=0402, Composition=ThickFilm, Contact Plating=Tin, Datasheet URL=https://industrial.panasonic.com/cdbs/www-data/pdf/RDA0000/AOA0000C304.pdf, Datasheet Version=02/2017, Depth=0.5mm, Height=0.35mm, Lead Free=LeadFree, Length=1mm, Manufacturer URL=http://www.panasonic.com/, Military Standard=Not, Mount=SurfaceMount, Mounting Technology=SurfaceMount, Number of Pins=2, Number of Terminations=2, Packaging=TapeandReel, Power Rating=100mW, Radiation Hardening=No, REACH SVHC=NoSVHC, RoHSCompliant=True, Termination=SMD/SMT, Voltage Rating (DC)=50V, Width=0.02inch
U1: library part CMP-09142-000117-1, "IC MMIC MESFET GAAS 1W 32-QFN", Case/Package=QFN, Max Operating Temperature=85°C, Max Power Dissipation=8.6W, Max Supply Voltage=14V, Min Operating Temperature=-40°C, Operating Supply Current=400mA, Operating Supply Voltage=12V, Package Quantity=50, Contact Plating=Tin, Gain=13dB, Lead Free="Contains Lead", Manufacturer Part Number=HMC637ALP5E, Mount="Surface Mount", Noise Figure=5dB, Number Of Channels=1, Number of Pins=32, P1dB=29dBm, Packaging=Tray, RoHS Compliant=No, Weight=0.006653oz
U2: "IC MMIC AMP VCO BUFFER 8-MSOP", Manufacturer="Analog Devices", Supplier Part Number 1=1127-1344-ND, Geometry.Height=1.1mm, PartNumber=HMC358MS8GE, Supplier 1=Digi-Key
U3: "LM27762 LOW-NOISE POSITIVE- AND", Manufacturer="Texas Instruments", Mouser Part Number=595-LM27762DSSR, Supplier Part Number 1=2156-LM27762DSSR-ND, Geometry.Height=0.8mm, Manufacturer Part Number=LM27762DSSR, Supplier 1=Digi-Key
U4: library part CMP-04918-000361-1, "IC REG BUCK ADJ 2A TSOT23-6", Case/Package=SOT, Manufacturer="Texas Instruments", Max Input Voltage=17V, Max Operating Temperature=125°C, Max Output Current=2A, Min Input Voltage=4.5V, Min Operating Temperature=-40°C, Output Voltage=7V, Quiescent Current=400uA, Switching Frequency=580kHz, Contact Plating=Tin, Lead Free="Lead Free", Manufacturer Part Number=TPS562201DDCR, Mount="Surface Mount", Number of Outputs=1, Number of Pins=6, Operating Supply Voltage=17V, Output Type=Adjustable, RoHS Compliant=Yes

## Free pads (board coordinates)
  round 1.016 smd mask+0.508: 0(7.62,44.704) 0(7.62,2.54) 0(43.18,44.704)
  round 3.81 hole 3.175 mask+0: 2(3.175,44.069) 2(3.175,3.175) 2(47.625,3.175) 2(47.625,44.069)

## Via types
v1: diameter 0.457, hole 0.254, Top Layer to Bottom Layer, tented both sides, 329 vias
v2: diameter 0.457, hole 0.254, Top Layer to Bottom Layer, 17 vias

## Nets (pads, with @x,y where several pads share a name; then routed paths per layer and width w, separated by ;. In a path a pad name is that pad's centre, name@x,y a point inside that pad or via, vN(x,y) a via of type N, cw(c..) or ccw(c..) an arc to the next point about the centre after c; other vN are vias at no path point)
3V0: C11.2 J6.1 R3.1 R4.1 U3.11 | length 26
  Top Layer w0.254: C11.2 31.82,10.653 31.82,10.71 32.024,10.914 U3.11
  Top Layer w0.381: R4.1 19.82,16.629 J6.1 ; 30.988,10.16 30.988,10.202 v1(30.988,10.753) ; v1(36.449,8.813) R3.1
  Top Layer w0.635: J6.1 20.38,16.069 21.145,16.069 24.006,13.208 27.982,13.208 30.988,10.202 C11.2
  Layer 1 w0.635: v1(30.988,10.753) 31.03,10.753 31.75,10.033 35.229,10.033 v1(36.449,8.813)
5V0: C10.2 C19.2 C20.2 J4.1 L2.2 R1.1 R2.1 R9.2 U3.3 | length 5.9
  Top Layer w0.305: v1(14.605,7.874) R9.2 ; v1(33.647,8.494) R1.1 ; v1(34.425,8.494) R2.1 ; U3.3 35.703,11.414 35.941,11.176 C10.2 v1(37.211,11.176)
  Top Layer w0.508: R1.1 R2.1
  other v1: 10.414,18.669 11.303,18.669 12.192,18.669 13.081,18.669 13.97,18.669 10.414,19.685 11.303,19.685 12.192,19.685 13.081,19.685 13.97,19.685 10.414,20.701 11.303,20.701 12.192,20.701 13.081,20.701 13.97,20.701
+12V: C21.2 C22.2 J2.1 J5.1 U4.3 U4.5 | length 9.7
  Top Layer w0.381: U4.3 17.748,10.8 17.748,10.319 18.64,9.427 18.64,8.758 U4.5 18.669,5.031 C22.2
  Top Layer w0.635: C21.2@18.874,1.603 C21.2
  Top Layer w1.27: C21.2 C22.2
  other v1: 24.511,10.287 25.4,10.287 26.289,10.287 24.511,11.303 25.4,11.303 26.289,11.303
-2V0: C13.1 D2.2 J3.1 R7.2 U3.6 | length 17.2
  Top Layer w0.381: R7.2@34.142,14.183 35.305,14.183 C13.1 ; J3.1 35.179,27.94 D2.2
  Top Layer w0.889: R7.2@34.142,14.183 34.163,14.204 J3.1
GND: C1.1 C2.1 C3.1 C4.1 C5.1 C8.2 C9.1 C10.1 C11.1 C13.2 C14.1 C15.1 C16.1 C17.1 C19.1 C20.1 C21.1 C22.1 D1.2 J1.2 J1.3 J1.4 J1.5 J2.2 J2.3 J2.4 J2.5 pad.2 R5.2 R6.1 R8.1 R10.1 U1.4 U1.12 U1.22 U1.33 U2.4 U2.5 U2.9 U3.4 U3.13 U4.1 | length 42.3
  Top Layer w0.381: v1(19.431,25.527) C5.1 C4.1 ; v1(19.431,26.543) C4.1 ; U4.1 19.619,10.49 19.695,10.414 v1(20.574,10.414) ; v1(19.685,27.94) C14.1 ; v1(19.685,28.829) C15.1 C14.1 ; v1@22.479,5.186 22.479,2.257 J2.2 ; J1.3 22.733,45.052 v1(22.733,42.164) ; U2.5 28.026,21.401 28.067,21.442 v1(28.067,21.463) ; v1(28.194,5.207) 28.194,2.192 J2.3 ; J1.2 28.448,44.987 v1(28.448,42.164) ; C3.1 C2.1 C1.1 v1(33.02,30.784) ; v1(31.369,8.509) C11.1 ; v1(31.8,31.242) C17.1 C16.1 v1(31.8,32.131) ; R6.1 v1(32.351,15.855) ; C13.2 35.384,15.36 35.384,15.84 v1(35.399,15.855) ; v1(36.576,29.337) R8.1 ; v1(37.338,8.813) R5.2 ; C4.1 20.368,26.633 20.368,27.099 20.574,27.305 20.574,27.898 C14.1
  Bottom Layer w0.381: v1(22.479,5.207) 22.479,2.257 J2.4 ; J1.5 22.733,45.052 v1(22.733,42.164) ; v1(28.194,5.207) 28.194,2.192 J2.5 ; J1.4 28.448,44.987 v1(28.448,42.164)
  other v1: 14.224,1.27 14.224,2.159 10.16,2.54 12.7,2.54 30.48,2.54 33.02,2.54 35.56,2.54 38.1,2.54 40.64,2.54 43.18,2.54 14.224,4.318 5.08,5.08 7.62,5.08 10.16,5.08 12.7,5.08 30.48,5.08 33.02,5.08 35.56,5.08 38.1,5.08 40.64,5.08 43.18,5.08 45.72,5.08 14.224,5.207 2.54,7.62 5.08,7.62 7.62,7.62 38.1,7.62 40.64,7.62 43.18,7.62 45.72,7.62 48.26,7.62 2.54,10.16 5.08,10.16 22.86,10.16 40.64,10.16 43.18,10.16 45.72,10.16 48.26,10.16 2.54,12.7 5.08,12.7 22.86,12.7 38.1,12.7 40.64,12.7 43.18,12.7 45.72,12.7 48.26,12.7 29.21,14.351 2.54,15.24 5.08,15.24 17.78,15.24 20.32,15.24 38.1,15.24 40.64,15.24 43.18,15.24 45.72,15.24 48.26,15.24 2.54,17.78 5.08,17.78 17.78,17.78 22.86,17.78 25.4,17.78 38.1,17.78 40.64,17.78 43.18,17.78 45.72,17.78 48.26,17.78 25.4,20.269 2.54,20.32 5.08,20.32 22.86,20.32 38.1,20.32 40.64,20.32 43.18,20.32 45.72,20.32 48.26,20.32 25.4,20.828 26.675,21.402 25.477,21.443 26.675,21.961 25.477,22.002 25.273,22.606 26.797,22.606 2.54,22.86 5.08,22.86 7.62,22.86 38.1,22.86 40.64,22.86 43.18,22.86 45.72,22.86 48.26,22.86 25.273,23.622 26.924,23.622 25.273,24.257 26.924,24.257 25.555,24.85 26.642,24.85 2.54,25.4 5.08,25.4 7.62,25.4 10.16,25.4 12.7,25.4 15.24,25.4 17.78,25.4 25.555,25.408 26.642,25.408 33.02,25.4 35.56,25.4 38.1,25.4 40.64,25.4 43.18,25.4 45.72,25.4 48.26,25.4 2.54,27.94 5.08,27.94 7.62,27.94 10.16,27.94 12.7,27.94 15.24,27.94 17.78,27.94 30.48,27.94 38.1,27.94 40.64,27.94 43.18,27.94 45.72,27.94 48.26,27.94 2.54,30.48 5.08,30.48 7.62,30.48 10.16,30.48 12.7,30.48 15.24,30.48 17.78,30.48 30.48,30.48 38.1,30.48 40.64,30.48 43.18,30.48 45.72,30.48 48.26,30.48 24.944,32.018 26.142,32.136 26.712,32.415 26.142,32.694 26.712,32.974 2.54,33.02 5.08,33.02 7.62,33.02 10.16,33.02 12.7,33.02 15.24,33.02 17.78,33.02 27.94,33.02 30.48,33.02 33.02,33.02 35.56,33.02 38.1,33.02 40.64,33.02 43.18,33.02 45.72,33.02 48.26,33.02 26.142,33.253 26.711,33.547 26.289,33.909 26.685,34.37 24.366,34.523 26.289,34.798 24.765,35.052 26.677,35.18 2.54,35.56 5.08,35.56 7.62,35.56 10.16,35.56 12.7,35.56 15.24,35.56 17.78,35.56 22.86,35.56 27.94,35.56 30.48,35.56 33.02,35.56 35.56,35.56 38.1,35.56 40.64,35.56 43.18,35.56 45.72,35.56 48.26,35.56 24.358,35.636 26.696,35.741 24.928,35.918 26.126,36.02 24.358,36.198 26.696,36.3 24.928,36.477 26.126,36.579 24.358,36.757 26.696,36.859 24.928,37.036 26.126,37.138 24.358,37.315 26.696,37.417 24.928,37.595 26.126,37.697 24.358,37.874 26.696,37.976 2.54,38.1 5.08,38.1 7.62,38.1 10.16,38.1 12.7,38.1 15.24,38.1 17.78,38.1 20.32,38.1 22.86,38.1 27.94,38.1 30.48,38.1 33.02,38.1 35.56,38.1 38.1,38.1 40.64,38.1 43.18,38.1 45.72,38.1 48.26,38.1 24.928,38.154 26.126,38.256 24.358,38.433 26.696,38.535 24.928,38.712 26.126,38.814 24.358,38.992 26.696,39.094 24.928,39.271 26.126,39.373 24.358,39.551 26.696,39.653 24.928,39.83 26.126,39.932 24.358,40.109 26.696,40.211 24.928,40.389 26.126,40.491 2.54,40.64 5.08,40.64 7.62,40.64 10.16,40.64 12.7,40.64 15.24,40.64 17.78,40.64 20.32,40.64 22.86,40.64 27.94,40.64 30.48,40.64 33.02,40.64 35.56,40.64 38.1,40.64 40.64,40.64 43.18,40.64 45.72,40.64 48.26,40.64 24.358,40.668 26.696,40.77 24.928,40.948 26.126,41.05 24.358,41.227 26.696,41.329 24.928,41.506 26.126,41.608 24.358,41.786 26.696,41.888 24.928,42.065 26.126,42.167 24.358,42.345 26.695,42.455 24.928,42.624 26.126,42.726 24.358,42.903 26.695,43.013 10.16,43.18 12.7,43.18 15.24,43.18 17.78,43.18 20.32,43.18 30.48,43.18 33.02,43.18 35.56,43.18 38.1,43.18 40.64,43.18
  other v2: 33.748,10.902 33.748,12.426 26.162,17.526 27.051,17.526 27.94,17.526 26.162,18.542 27.051,18.542 27.94,18.542 24.638,27.686 25.781,27.686 26.924,27.686 24.638,28.829 25.781,28.829 26.924,28.829 24.638,29.972 25.781,29.972 26.924,29.972
"LO OUT": C6.1 J1.1 | length 10.2
  Top Layer w0.197: C6.1 J1.1
NetC6_2: C6.2 L1.2 U1.21 | length 2.7
  Top Layer w0.197: C6.2 25.543,33.978 U1.21
NetC7_1: C7.1 U2.8 | length 2.5
  Top Layer w0.197: C7.1@26.035,22.691 26.076,22.65 U2.8
NetC7_2: C7.2 U1.5 | length 2.5
  Top Layer w0.197: C7.2@26.035,23.791 26.043,23.799 U1.5
NetC8_1: C8.1 U3.5 | length 1.9
  Top Layer w0.305: U3.5 35.529,12.414 36.047,12.932 36.047,13.018 36.174,13.018 C8.1
NetC12_1: C12.1 U3.9 | length 1.7
  Top Layer w0.254: C12.1 32.197,11.914 U3.9
NetC12_2: C12.2 U3.10 | length 1.4
  Top Layer w0.254: C12.2 31.597,11.414 U3.10
NetC14_2: C14.2 U1.30 | length 1.7
  Top Layer w0.305: C14.2 21.734,28.042 U1.30
NetC15_2: C15.2 U1.29 | length 1.8
  Top Layer w0.305: C15.2 22.352,28.829 22.479,28.702 22.639,28.542 U1.29
NetC16_2: C16.2 U1.16 | length 2.9
  Top Layer w0.305: U1.16 28.637,30.542 29.083,30.988 29.083,31.75 29.464,32.131 C16.2
NetC17_2: C17.2 U1.15 | length 2.3
  Top Layer w0.305: U1.15 28.857,30.042 C17.2
NetC18_2: C18.2 U4.6 | length 6.5
  Top Layer w0.381: U4.6 20.286,8.729 21.209,9.652 21.209,11.43 20.672,11.967 20.672,12.521 20.451,12.742 20.451,13.473 20.162,13.762 C18.2
NetD1_1: D1.1 R4.2 | length 1.2
  Top Layer w0.381: R4.2 20.844,19.328 20.844,20.423 D1.1
NetD2_1: D2.1 R8.2 | length 1.5
  Top Layer w0.381: D2.1 36.243,31.155 36.334,31.064 36.491,31.064 R8.2
NetR1_2: R1.2 U3.12 | length 1
  Top Layer w0.254: R1.2 32.698,9.449 U3.12
NetR2_2: R2.2 U3.1 | length 1.5
  Top Layer w0.254: U3.1 35.123,10.414 35.304,10.233 35.304,9.519 R2.2
NetR3_2: R3.2 R5.1 U3.2 | length 2.8
  Top Layer w0.254: U3.2 35.314,10.914 35.814,10.414 36.441,10.414 R3.2
  Top Layer w0.508: R3.2 R5.1
NetR6_2: R6.2 R7.1 U3.7 | length 2.5
  Top Layer w0.254: 32.242,12.959 32.305,12.895 32.647,12.895 32.657,12.905 32.689,12.905 U3.7
  Top Layer w0.381: 32.242,12.959 32.242,14.128 R6.2@32.326,14.212 ; R6.2@32.38,14.208 33.117,14.208 R7.1
NetR9_1: R9.1 R10.2 U4.4 | length 2.9
  Top Layer w0.381: R9.1 R9.1@16.092,7.874 ; R10.2 16.148,7.749 16.108,7.789 16.108,7.859 R9.1@16.092,7.874 ; U4.4 16.928,8.729 16.108,7.909 16.108,7.889 R9.1@16.092,7.874
SW_OUT: C18.1 L2.1 U4.2 | length 2.9
  Top Layer w0.381: U4.2 18.669,13.745 C18.1
VCC: C9.2 J6.2 U2.1 U2.3 | length 8.8
  Top Layer w0.381: 26.077,14.351 U2.1@26.077,15.833 ; C9.2@27.376,14.365 U2.3
  Top Layer w0.508: 26.077,14.351 C9.2
  Top Layer w0.762: J6.2 22.634,16.355 23.523,16.355 25.527,14.351 26.077,14.351
VDD: J5.2 L1.1 | length 3.1
  Top Layer w0.889: J5.2 23.495,33.02 24.638,33.02
VGG1: C1.2 C2.2 C3.2 J3.2 U1.13 | length 6.8
  Top Layer w0.381: U1.13 28.297,29.041 C3.2 C2.2 C1.2
  Top Layer w0.635: J3.2 C2.2
VGG2: C4.2 C5.2 J4.2 U1.2 | length 7.8
  Top Layer w0.381: 21.378,24.935 23.746,24.935 24.543,25.731 U1.2
  Top Layer w0.635: C4.2 C5.2 21.378,24.935 21.378,24.342 J4.2
VGG_EN: U3.8
pads on no net: U1.1 U1.3 U1.6 U1.7 U1.8 U1.9 U1.10 U1.11 U1.14 U1.17 U1.18 U1.19 U1.20 U1.23 U1.24 U1.25 U1.26 U1.27 U1.28 U1.31 U1.32 U2.2 U2.6 U2.7

## Polygon pours and split planes (outlines as drawn)
GND on Top Layer "NONET_L-01_P-001" (solid, pour order 19): 0,0 0,47.244 50.8,47.244 50.8,0
+12V on Top Layer "Top Layer-+12V" (solid, pour order 12): 18.161,0.889 20.066,0.889 20.955,1.778 20.955,4.953 21.717,5.715 23.622,5.715 24.765,4.572 24.765,0.254 26.035,0.254 26.035,4.572 27.178,5.715 27.178,11.557 26.67,12.065 24.13,12.065 23.622,11.557 23.622,7.493 19.558,7.493 18.923,8.128 18.923,8.636 18.415,8.636 18.415,5.969 18.161,5.715
-2V0 on Top Layer "NONET_L-01_P-001" (solid, pour order 7): 34.623,12.763 34.624,12.764 35.37,12.764 35.687,13.081 35.687,14.605 33.782,14.605 33.782,13.862 34.584,13.06
5V0 on Top Layer "NONET_L-01_P-001" (solid, pour order 4): 8.382,14.859 8.382,17.907 8.509,18.034 8.509,21.209 9.144,21.844 14.351,21.844 14.986,21.209 14.986,17.526 15.875,16.637 15.875,14.859
SW_OUT on Top Layer "Top Layer-SW_OUT" (solid, pour order 2): 16.891,10.06 16.891,11.303 17.272,11.684 18.098,11.684 18.415,11.367 18.415,10.414 18.923,10.414 18.923,11.303 19.177,11.557 19.177,14.224 17.78,14.224 15.494,11.938 9.271,11.938 8.382,11.049 8.382,9.271 9.017,8.636 15.229,8.636
5V0 on Bottom Layer "Bottom Layer-5V0" (solid, pour order 13): 7.747,9.779 11.176,6.35 34.798,6.35 35.433,6.985 35.433,8.636 36.449,9.652 37.084,9.652 37.973,10.541 37.973,11.176 37.465,11.684 35.814,11.684 34.798,10.668 33.401,9.271 18.542,9.271 16.256,11.557 16.256,17.526 21.082,22.352 21.082,24.384 9.906,24.384 7.747,22.225
+12V on Bottom Layer "NONET_L-01_P-001" (solid, pour order 10): 18.542,35.433 18.542,30.607 28.702,20.447 28.702,16.383 26.67,14.351 25.781,14.351 23.876,12.446 23.876,10.414 24.384,9.906 27.94,9.906 35.306,17.272 35.306,22.606 33.147,24.765 31.369,24.765 29.083,27.051 29.083,30.353 26.67,32.766 21.336,32.766 20.574,33.528 20.574,35.433
GND on Bottom Layer "NONET_L-01_P-001" (solid, pour order 17): 0,0 0,47.244 50.8,47.244 50.8,0
GND on Layer 1 "NONET_L-01_P-001" (solid, pour order 5): 0,0 0,47.244 50.8,47.244 50.8,0
GND on GND1 "NONET_L-01_P-001" (solid, pour order 15): 0,0 0,47.244 50.8,47.244 50.8,0

## Keep-outs
Top Layer:
  circle w0.025: c43.18,44.704 r1.063
  circle w0.025: c7.62,44.704 r1.063
  circle w0.025: c7.62,2.54 r1.063

## Other copper
Top Layer:
  pour cut-out: 26.416,47.244 26.416,43.331 24.638,43.331 24.638,47.244
GND1:
  pour cut-out: 26.416,47.244 26.416,43.308 24.638,43.308 24.638,47.244
Layer 1:
  pour cut-out: 26.416,47.244 26.416,43.308 24.638,43.308 24.638,47.244

## Silkscreen, mask and mechanical layers (free items; w line width, h text height)
Top Overlay:
  drawing of 21 lines, arcs and shapes, not listed
  text "RF_OUT" at 30.226,44.45 h1.52
  text "+12V" at 12.903,34.239 h1.02
  text "-2V0" at 35.382,24.079 h1.02
  text "+5V0" at 13.284,23.063 h1.02
  text "PN: PWRMOD-001 Rev. A" at 45.644,12.395 h1.02 r90
  text "+12V" at 22.479,6.096 h1.52
Top Solder:
  rectangle: 24.13,31.885 26.937,43.307
  lines w0.197: 25.527,35.094 25.527,43.561 ; 25.543,31.295 25.543,33.978 ; 26.043,23.799 26.043,26.289 ; 26.076,20.234 26.076,22.65
Board Outline:
  the board outline again, w0.102